# Altium PCB FM375_TEST_BOARD.PcbDoc (part 2 of 2)
Units mm, origin at the board's own origin, x right, y up, seen from the top; angles counter-clockwise.
Board outline 713.36 x 446.91 mm, 2 copper layers (Top Layer, Bottom Layer); 207 components, 223 nets, 969 pads, 41 vias.
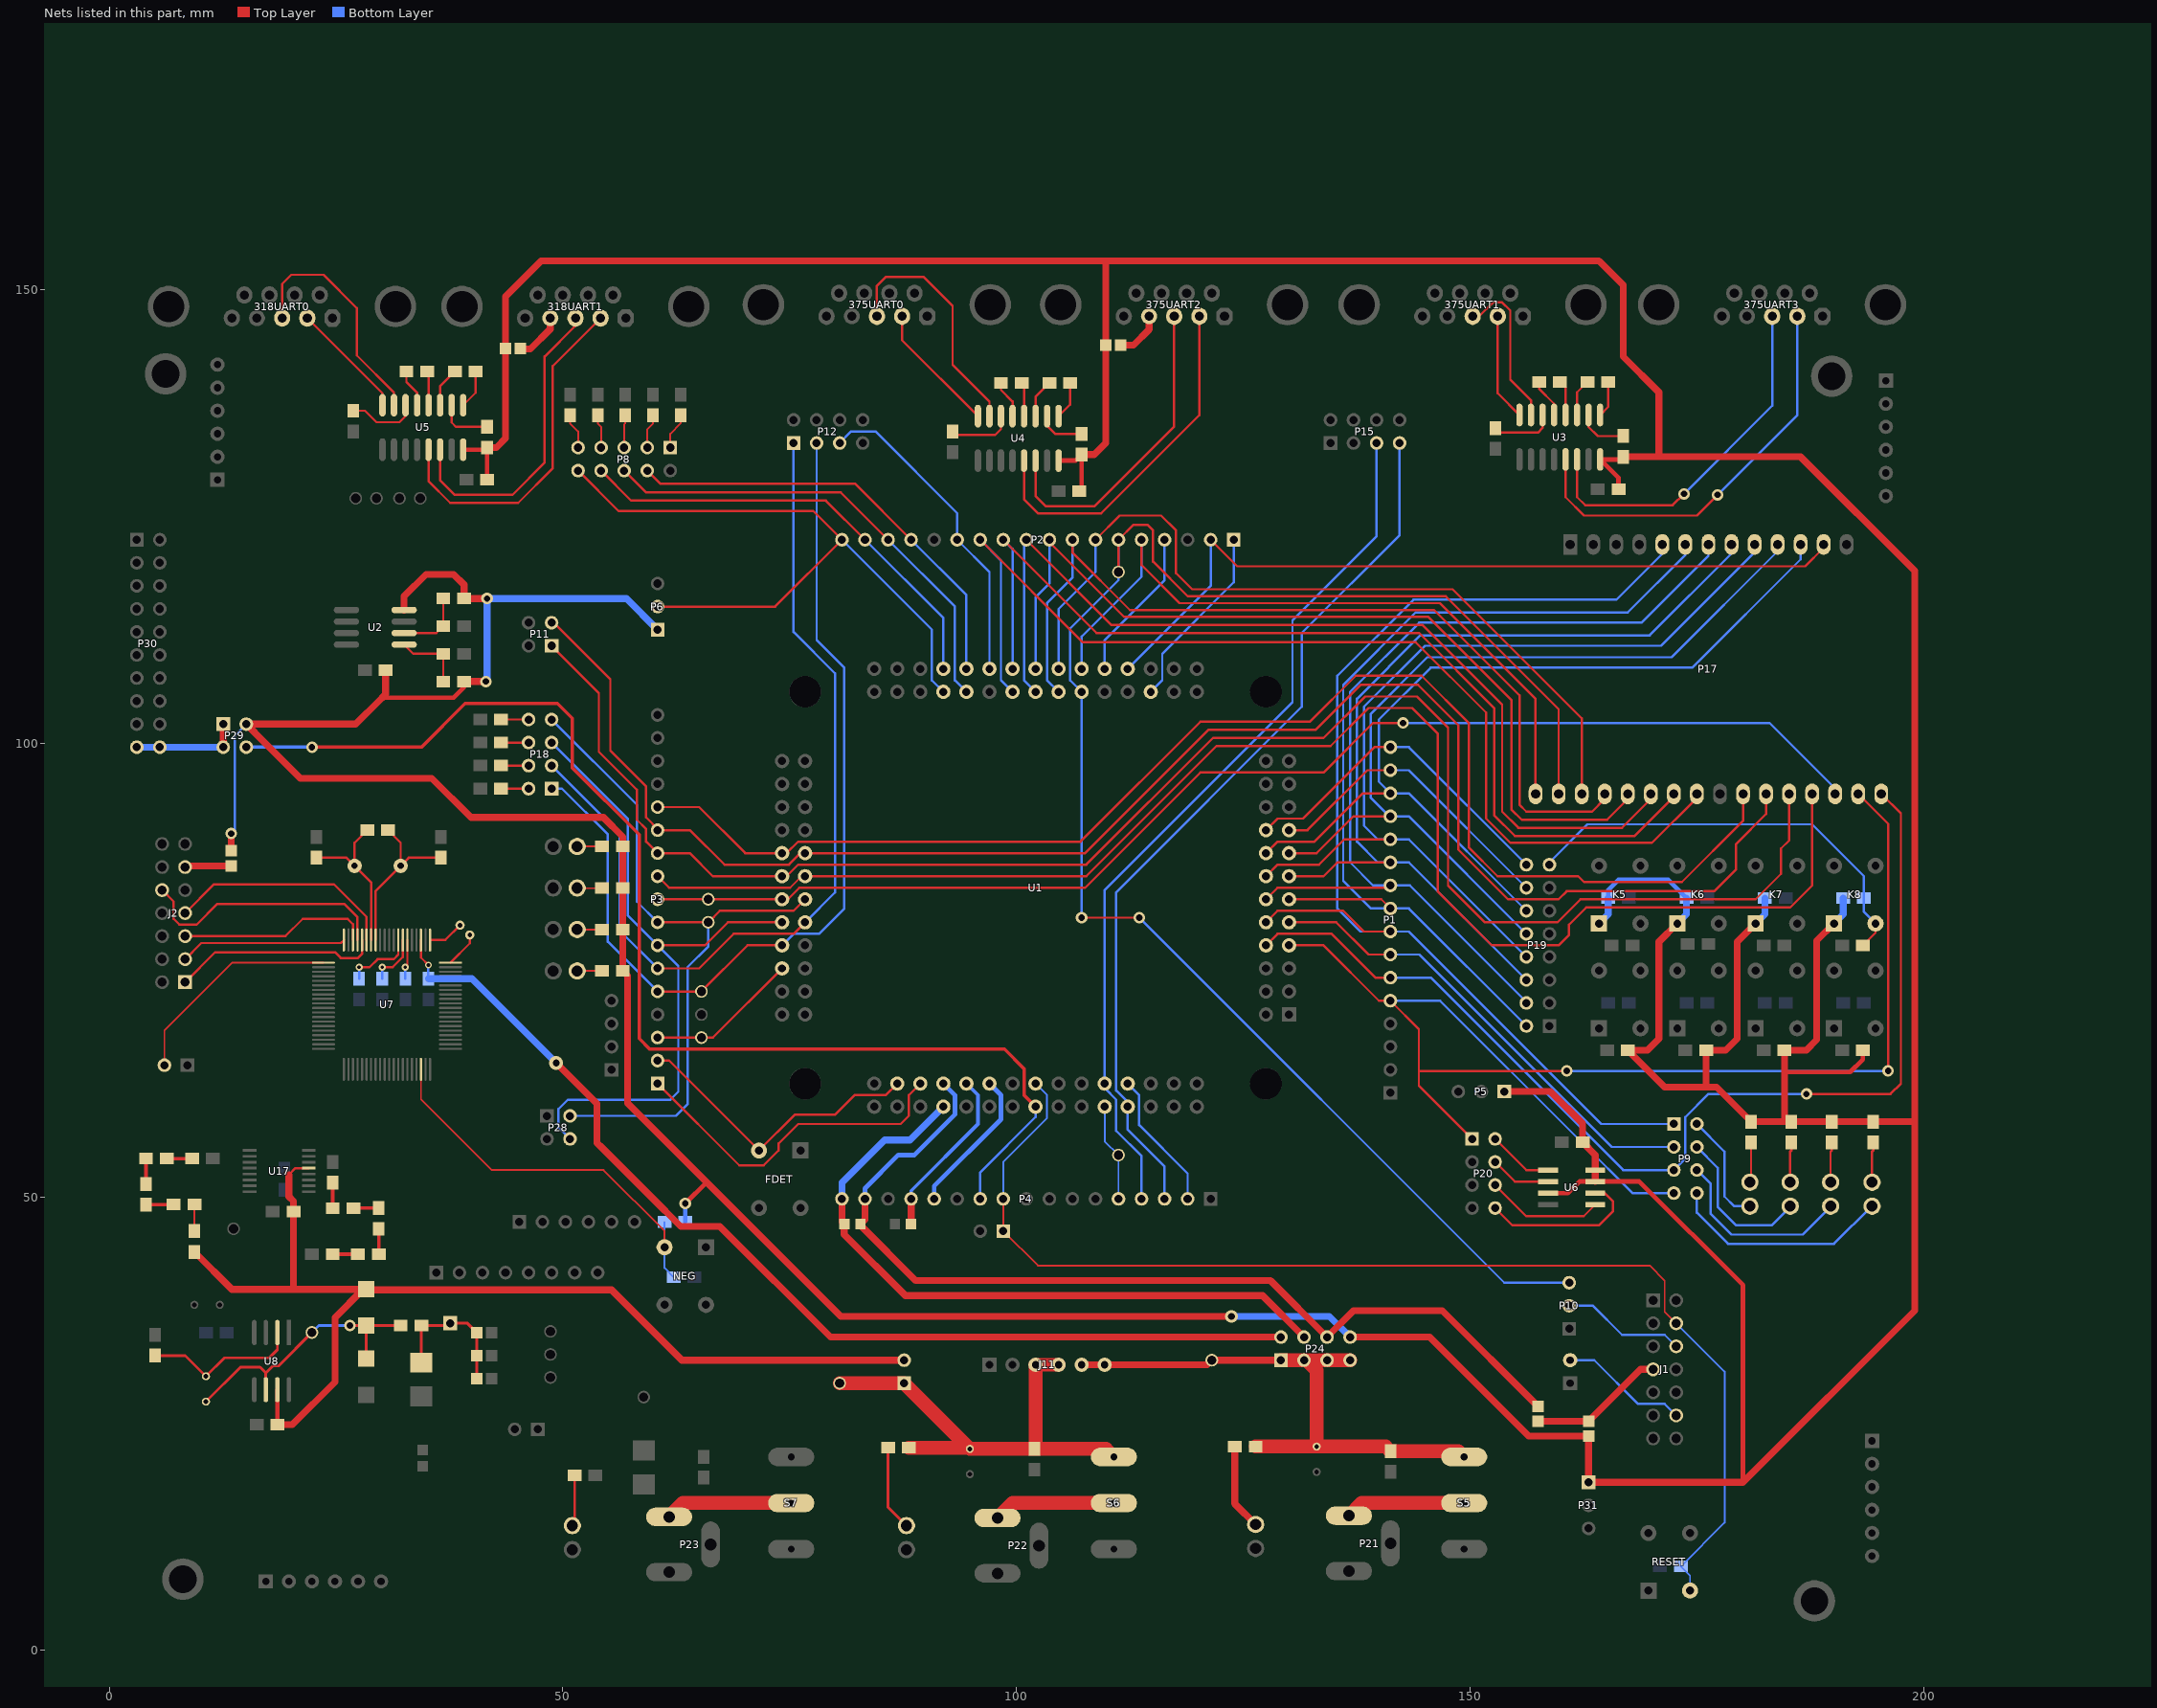
[diagram p2: the nets of this part, all layers, seen from the top]

## Via types
v1: diameter 1.27, hole 0.711, Top Layer to Bottom Layer, 23 vias
v2: diameter 0.762, hole 0.406, Top Layer to Bottom Layer, 8 vias
v3: diameter 0.914, hole 0.508, Top Layer to Bottom Layer, 3 vias
v4: diameter 1.397, hole 0.762, Top Layer to Bottom Layer, 2 vias
v5: diameter 1.016, hole 0.559, Top Layer to Bottom Layer, 2 vias
v6: diameter 0.889, hole 0.483, Top Layer to Bottom Layer, 1 vias
v7: diameter 0.762, hole 0.381, Top Layer to Bottom Layer, 1 vias
v8: diameter 1.524, hole 0.762, Top Layer to Bottom Layer, 1 vias

## Nets (pads, with @x,y where several pads share a name; then routed paths per layer and width w, separated by ;. In a path a pad name is that pad's centre, name@x,y a point inside that pad or via, vN(x,y) a via of type N, cw(c..) or ccw(c..) an arc to the next point about the centre after c; other vN are vias at no path point) (continued)
KEY8: C57.2 K8.2 P19.15 R47.2 | length 47.8
  Top Layer w0.254: R47.2@193.294,77.724 194.691,79.121 K8.2@194.691,80.137
  Bottom Layer w0.254: P19.15@158.75,86.614 158.75,86.868 162.941,91.059 187.706,91.059 193.421,85.344 C57.2@193.421,82.931 193.421,81.407 K8.2@194.691,80.137
LED1: P9.8 V1.K | length 24.6
  Bottom Layer w0.254: P9.8@175.006,50.419 175.006,48.26 178.435,44.831 190.119,44.831 194.259,48.971 V1.K@194.31,48.971
LED2: P9.6 V2.K | length 21
  Bottom Layer w0.254: P9.6@175.006,52.959 176.53,51.435 176.53,48.133 178.816,45.847 186.69,45.847 189.738,48.895 V2.K@189.738,48.971
LED3: P9.4 V3.K | length 17.3
  Bottom Layer w0.254: P9.4@175.006,55.499 177.292,53.213 177.292,48.895 179.324,46.863 183.261,46.863 185.293,48.895 V3.K@185.293,48.971
LED4: P9.2 V4.K | length 12.5
  Bottom Layer w0.254: P9.2@175.006,58.039 178.054,54.991 178.054,50.038 179.121,48.971 V4.K@180.848,48.971
MISO_FLASH: P20.4 U6.2 | length 6.7
  Top Layer w0.254: P20.4@152.764,53.848 152.781,53.848 154.94,51.689 U6.2@158.606,51.689
MOSI_FLASH: P20.6 U6.5 | length 13
  Top Layer w0.254: P20.6@152.764,51.308 156.193,47.879 162.536,47.879 U6.5@163.806,49.149
NEG: C16.1 NEG.2 R31.1 U7.38 | length 44.5
  Top Layer w0.203: U7.38@34.372,64.069 34.372,60.751 42.164,52.959 54.483,52.959 61.214,46.228 NEG.2@61.214,44.45
  Bottom Layer w0.203: R31.1@61.214,47.244 NEG.2@61.214,44.45 61.214,42.164 C16.1@62.23,41.148
Net318UART0_2: 318UART0.2 U5.8 | length 13
  Top Layer w0.254: 318UART0.2@21.84,146.863 30.124,138.578 U5.8@30.124,137.259
Net318UART0_3: 318UART0.3 U5.7 | length 26.3
  Top Layer w0.254: 318UART0.3@19.067,146.863 19.067,150.622 20.083,151.638 23.622,151.638 27.305,147.955 27.305,142.748 31.394,138.659 U5.7@31.394,137.259
Net318UART1_2: 318UART1.2 U5.13 | length 38.5
  Top Layer w0.254: U5.13@35.204,132.359 35.204,128.88 37.592,126.492 45.085,126.492 48.895,130.302 48.895,141.584 318UART1.2@54.174,146.863
Net318UART1_3: 318UART1.3 U5.14 | length 34.4
  Top Layer w0.254: U5.14@36.474,132.359 36.474,129.007 38.1,127.381 44.45,127.381 48.006,130.937 48.006,142.621 51.401,146.016 318UART1.3@51.401,146.863
Net318UART1_4: 318UART1.4 S9.2 | length 5.4
  Top Layer w0.762: S9.2@45.339,143.446 46.419,143.446 48.628,145.656 318UART1.4@48.628,146.863
Net375UART0_2: 375UART0.2 U4.8 | length 14.5
  Top Layer w0.254: 375UART0.2@87.397,147.066 87.397,144.415 U4.8@95.758,136.054
Net375UART0_3: 375UART0.3 U4.7 | length 27.2
  Top Layer w0.254: 375UART0.3@84.624,147.066 84.624,150.41 85.598,151.384 89.789,151.384 92.964,148.209 92.964,141.732 97.028,137.668 U4.7@97.028,136.054
Net375UART1_2: 375UART1.2 U3.8 | length 11.9
  Top Layer w0.254: 375UART1.2@153.056,147.066 153.056,138.573 U3.8@155.448,136.181
Net375UART1_3: 375UART1.3 U3.7 | length 17.6
  Top Layer w0.254: 375UART1.3@150.283,147.066 151.003,147.066 152.527,148.59 153.543,148.59 154.432,147.701 154.432,140.081 156.718,137.795 U3.7@156.718,136.181
Net375UART2_2: 375UART2.2 U4.13 | length 39.6
  Top Layer w0.254: U4.13@100.838,131.154 100.838,126.873 102.362,125.349 109.347,125.349 120.163,136.165 375UART2.2@120.163,147.066
Net375UART2_3: 375UART2.3 U4.14 | length 35.5
  Top Layer w0.254: U4.14@102.108,131.154 102.108,127.254 103.251,126.111 108.585,126.111 117.39,134.916 375UART2.3@117.39,147.066
Net375UART2_4: 375UART2.4 S8.2 | length 5.4
  Top Layer w0.203: 375UART2.4@114.618,147.066 375UART2.4@114.681,147.003
  Top Layer w0.762: S8.2@111.506,143.891 112.903,143.891 114.618,145.606 375UART2.4@114.618,147.066
Net375UART3_2: 375UART3.2 U3.13 | length 46
  Top Layer w0.254: U3.13@160.528,131.281 160.528,127.127 162.56,125.095 175.006,125.095 v1(177.292,127.381)
  Bottom Layer w0.254: v1(177.292,127.381) 186.076,136.165 375UART3.2@186.076,147.066
Net375UART3_3: 375UART3.3 U3.14 | length 40.4
  Top Layer w0.254: U3.14@161.798,131.281 161.798,127.127 162.687,126.238 172.339,126.238 v1(173.588,127.487)
  Bottom Layer w0.254: v1(173.588,127.487) 183.303,137.202 375UART3.3@183.303,147.066
"NetADC VIN_1": "ADC VIN.1" C30.1 R22.1 S2.2 S3.2 S4.2 | length 15.8
  Top Layer w0.305: C30.1@34.417,31.748 R22.1@34.417,35.814 37.338,35.814 37.592,36.068 39.497,36.068 S2.2@40.513,35.052 S3.2@40.513,32.512 S4.2@40.513,29.972
NetC2_1: C2.1 U4.2 | length 5.2
  Top Layer w0.254: U4.2@103.378,136.054 103.378,135.001 104.267,134.112 C2.1@107.188,134.112
NetC3_1: C3.1 U4.3 | length 4.3
  Top Layer w0.254: U4.3@102.108,136.054 102.108,138.176 C3.1@103.632,139.7
NetC3_2: C3.2 U4.1 | length 4.2
  Top Layer w0.254: U4.1@104.648,136.054 105.918,137.324 C3.2@105.918,139.7
NetC4_1: C4.1 U4.4 | length 3.8
  Top Layer w0.254: C4.1@100.584,139.7 100.838,139.446 U4.4@100.838,136.054
NetC4_2: C4.2 U4.5 | length 4.2
  Top Layer w0.254: C4.2@98.298,139.7 98.298,138.938 99.568,137.668 U4.5@99.568,136.054
NetC6_1: C6.1 U4.6 | length 7.2
  Top Layer w0.254: C6.1@92.964,134.366 93.345,133.985 97.663,133.985 98.298,134.62 U4.6@98.298,136.054
NetC7_1: C7.1 U3.2 | length 5.5
  Top Layer w0.254: U3.2@163.068,136.181 163.068,134.874 164.084,133.858 C7.1@166.878,133.858
NetC8_1: C8.1 U3.3 | length 4.1
  Top Layer w0.254: U3.3@161.798,136.181 161.798,138.684 C8.1@162.941,139.827
NetC8_2: C8.2 U3.1 | length 4
  Top Layer w0.254: U3.1@164.338,136.181 165.227,137.07 C8.2@165.227,139.827
NetC9_1: C9.1 U3.4 | length 3.9
  Top Layer w0.254: C9.1@159.893,139.827 160.528,139.192 U3.4@160.528,136.181
NetC9_2: C9.2 U3.5 | length 4.3
  Top Layer w0.254: C9.2@157.607,139.827 157.607,139.065 159.258,137.414 U3.5@159.258,136.181
NetC11_1: C11.1 U3.6 | length 7.1
  Top Layer w0.254: C11.1@152.781,134.747 153.289,134.239 157.48,134.239 157.988,134.747 U3.6@157.988,136.181
NetC12_1: C12.1 P18.4 | length 3
  Top Layer w0.254: C12.1@43.18,97.536 P18.4@46.228,97.536
NetC13_1: C13.1 P18.6 | length 3
  Top Layer w0.254: C13.1@43.18,100.076 P18.6@46.228,100.076
NetC14_1: C14.1 P18.8 | length 3
  Top Layer w0.254: C14.1@43.18,102.616 P18.8@46.228,102.616
NetC15_1: C15.1 P18.2 | length 3
  Top Layer w0.254: C15.1@43.18,94.996 P18.2@46.228,94.996
NetC29_1: "integrator out.1" C29.1 D6.1 D7.2 R22.2 U8.6 | length 30.9
  Top Layer w0.305: C29.1@10.668,27.432 14.478,31.242 16.637,31.242 17.272,30.607 ; U8.6@17.272,28.752 17.272,30.607 ; 22.352,35.052 18.669,31.369 18.034,31.369 17.272,30.607 ; v1(26.543,35.814) D6.1@28.321,35.814 ; D7.2@28.321,32.194 D6.1@28.321,35.814 ; R22.2@32.131,35.814 D6.1@28.321,35.814
  Bottom Layer w0.305: 22.352,35.052 23.114,35.814 v1(26.543,35.814)
NetC29_2: C29.2 R21.1 U8.2 | length 17.5
  Top Layer w0.305: R21.1@5.08,32.512 8.382,32.512 C29.2@10.668,30.226 12.7,32.258 17.653,32.258 18.542,33.147 U8.2@18.542,35.052
NetC42_1: C42.1 U5.2 | length 6
  Top Layer w0.254: U5.2@37.744,137.259 37.744,135.357 38.227,134.874 C42.1@41.656,134.874
NetC43_1: C43.1 U5.3 | length 4.4
  Top Layer w0.254: U5.3@36.474,137.259 36.474,139.344 C43.1@38.1,140.97
NetC43_2: C43.2 U5.1 | length 4.3
  Top Layer w0.254: U5.1@39.014,137.259 40.386,138.631 C43.2@40.386,140.97
NetC44_1: C44.1 U5.4 | length 3.8
  Top Layer w0.254: C44.1@35.052,140.97 35.204,140.818 U5.4@35.204,137.259
NetC44_2: C44.2 U5.5 | length 4.2
  Top Layer w0.254: C44.2@32.766,140.97 32.766,139.827 33.934,138.659 U5.5@33.934,137.259
NetC46_2: C46.2 U5.6 | length 7.8
  Top Layer w0.254: C46.2@26.924,136.652 28.194,136.652 29.464,135.382 32.004,135.382 32.664,136.042 U5.6@32.664,137.259
NetD1_A: D1.A R23.2 | length 2.7
  Top Layer w0.203: D1.A@51.587,74.904 R23.2@54.33,74.904
NetD2_A: D2.A R24.2 | length 2.7
  Top Layer w0.203: D2.A@51.587,79.476 R24.2@54.33,79.476
NetD3_A: D3.A R25.2 | length 2.7
  Top Layer w0.203: D3.A@51.611,84.023 R25.2@54.331,84.023
NetD4_A: D4.A R26.2 | length 2.7
  Top Layer w0.203: D4.A@51.587,88.62 R26.2@54.33,88.62
NetD8_A: D8.A R35.2 | length 9.5
  Top Layer w0.762: R35.2@124.079,22.479 124.079,16.18 D8.A@126.365,13.894
NetD9_A: D9.A R36.2 | length 9.4
  Top Layer w0.305: R36.2@85.852,22.352 85.852,15.799 D9.A@87.884,13.767
NetD10_A: D10.A R37.2 | length 5.6
  Top Layer w0.305: D10.A@51.054,13.767 51.308,14.021 R37.2@51.308,19.304
NetJ1_12: J1.12 JP1.2 | length 14.2
  Bottom Layer w0.254: JP1.2@161.036,32.004 163.703,32.004 168.529,27.178 171.45,27.178 J1.12@172.72,25.908
NetP8_1: P8.1 R5.1 | length 4
  Top Layer w0.203: P8.1@61.849,132.588 61.849,134.112 62.992,135.255 R5.1@62.992,136.144
NetP8_3: P8.3 R6.1 | length 3.8
  Top Layer w0.203: P8.3@59.309,132.588 59.309,134.62 59.944,135.255 R6.1@59.944,136.144
NetP8_5: P8.5 R7.1 | length 3.6
  Top Layer w0.203: P8.5@56.769,132.588 56.769,135.128 56.896,135.255 R7.1@56.896,136.144
NetP8_7: P8.7 R8.1 | length 3.7
  Top Layer w0.203: R8.1@53.848,136.144 53.848,135.255 54.229,134.874 P8.7@54.229,132.588
NetP8_9: P8.9 R9.1 | length 3.9
  Top Layer w0.203: R9.1@50.8,136.144 50.8,135.255 51.689,134.366 P8.9@51.689,132.588
NetP21_1: P21.1 S5.2 | length 13.3
  Top Layer w1.524: P21.1@136.652,14.859 138.049,16.256 S5.2@149.352,16.256
NetP22_1: P22.1 S6.2 | length 13.5
  Top Layer w1.524: P22.1@97.917,14.605 99.568,16.256 S6.2@110.744,16.256
NetP23_1: P23.1 S7.2 | length 14.1
  Top Layer w1.524: P23.1@61.722,14.732 63.246,16.256 S7.2@75.184,16.256
NetR1_2: R1.2 V1.A | length 4.4
  Top Layer w0.254: V1.A@194.31,51.613 194.31,54.991 194.437,55.118 R1.2@194.437,56.007
NetR2_2: R2.2 V2.A | length 4.4
  Top Layer w0.254: V2.A@189.738,51.613 189.738,54.991 189.865,55.118 R2.2@189.865,56.007
NetR3_2: R3.2 V3.A | length 4.4
  Top Layer w0.254: V3.A@185.293,51.613 185.293,54.991 185.42,55.118 R3.2@185.42,56.007
NetR4_2: R4.2 V4.A | length 4.4
  Top Layer w0.254: V4.A@180.848,51.613 180.975,51.74 R4.2@180.975,56.007
NetR10_1: R10.1 R11.2 | length 2.8
  Top Layer w0.381: R11.2@6.35,54.229 R10.1@9.144,54.229
NetR11_1: R11.1 R12.2 | length 2.8
  Top Layer w0.381: R12.2@4.064,51.435 R11.1@4.064,54.229
NetR12_1: R12.1 R13.1 | length 3
  Top Layer w0.381: R12.1@4.064,49.149 R13.1@7.112,49.149
NetR13_2: R13.2 R14.1 | length 2.9
  Top Layer w0.203: R14.1@9.398,46.228 R13.2@9.398,49.149
NetR15_2: R15.2 R16.1 | length 2.8
  Top Layer w0.381: R16.1@24.638,48.768 R15.2@24.638,51.562
NetR16_2: R16.2 R17.1 | length 2.8
  Top Layer w0.381: R16.2@26.924,48.768 R17.1@29.718,48.768
NetR17_2: R17.2 R18.1 | length 2.8
  Top Layer w0.381: R18.1@29.718,43.688 R17.2@29.718,46.482
NetR18_2: R18.2 R19.1 | length 2.8
  Top Layer w0.381: R19.1@24.638,43.688 R18.2@27.432,43.688
NetR27_2: R27.2 R30.2 U2.5 | length 7.8
  Top Layer w0.254: U2.5@32.512,110.871 33.528,109.855 R30.2@36.83,109.855 R27.2@36.83,106.807
NetR28_2: R28.2 R29.1 U2.6 | length 7.7
  Top Layer w0.254: U2.6@32.512,112.141 36.068,112.141 R29.1@36.83,112.903 R28.2@36.83,115.951
OSCIN: C22.1 R20.2 U7.73 XTAL2.2 | length 18.6
  Top Layer w0.254: U7.73@29.372,78.319 29.372,83.728 XTAL2.2@32.131,86.487 ; R20.2@30.734,90.424 32.131,89.027 XTAL2.2@32.131,86.487 ; C22.1@36.576,87.376 33.02,87.376 XTAL2.2@32.131,86.487
OSCOUT: C23.1 R20.1 U7.74 XTAL2.1 | length 18
  Top Layer w0.254: C23.1@22.86,87.376 26.162,87.376 XTAL2.1@27.051,86.487 ; R20.1@28.448,90.424 27.051,89.027 XTAL2.1@27.051,86.487 ; U7.74@28.872,78.319 28.872,84.666 XTAL2.1@27.051,86.487
PA4: P1.5 P9.7 P17.28 P20.1 U1.7 | length 156.3
  Top Layer w0.254: U1.7@130.048,77.724 133.858,77.724 139.954,71.628 P1.5@141.224,71.628 144.353,68.499 144.353,63.881 ; P20.1@150.224,56.388 144.353,62.259 144.353,63.881 ; v1(160.655,63.881) 144.353,63.881 ; P17.28@192.786,94.42 196.088,91.118 v1(196.088,63.881)
  Bottom Layer w0.254: P1.5@141.224,71.628 146.685,71.628 162.369,55.944 167.894,50.419 P9.7@172.466,50.419 ; v1(160.655,63.881) v1(196.088,63.881)
PA5: P1.6 P9.5 P17.29 U1.8 | length 120.7
  Top Layer w0.254: U1.8@127.508,77.724 128.778,78.994 134.747,78.994 139.573,74.168 P1.6@141.224,74.168 ; v1(187.071,61.341) 196.342,61.341 197.485,62.484 197.485,92.261 P17.29@195.326,94.42
  Bottom Layer w0.254: P1.6@141.224,74.168 145.669,74.168 166.878,52.959 P9.5@172.466,52.959 173.736,54.229 173.736,58.801 176.276,61.341 v1(187.071,61.341)
PA6: P1.7 P9.3 U1.9 | length 52.7
  Top Layer w0.254: U1.9@130.048,80.264 135.255,80.264 138.811,76.708 P1.7@141.224,76.708
  Bottom Layer w0.254: P1.7@141.224,76.708 144.399,76.708 165.608,55.499 P9.3@172.466,55.499
PA7: P1.8 P9.1 P17.5 U1.10 | length 130.2
  Top Layer w0.254: U1.10@127.508,80.264 128.778,81.534 136.017,81.534 138.303,79.248 P1.8@141.224,79.248
  Bottom Layer w0.254: P17.5@171.196,121.92 171.196,120.904 166.116,115.824 143.764,115.824 135.382,107.442 135.382,81.788 137.922,79.248 143.256,79.248 164.465,58.039 P9.1@172.466,58.039
PAD_CPLL: C18.2 U7.68 | length 7.8
  Top Layer w0.254: v2(27.559,75.311) 28.702,75.311 29.591,76.2 31.369,76.2 31.872,76.703 U7.68@31.872,78.319
  Bottom Layer w0.254: C18.2@27.559,74.041 v2(27.559,75.311)
PB0: P1.9 P17.6 P19.2 U1.11 | length 104.8
  Top Layer w0.254: U1.11@130.048,82.804 140.208,82.804 P1.9@141.224,81.788
  Bottom Layer w0.254: P19.2@156.21,68.834 143.256,81.788 139.065,81.788 136.017,84.836 136.017,106.426 144.018,114.427 167.386,114.427 173.736,120.777 P17.6@173.736,121.92
PB1: P1.10 P17.7 P19.4 U1.12 | length 106
  Top Layer w0.254: U1.12@127.508,82.804 128.778,84.074 140.97,84.074 P1.10@141.224,84.328
  Bottom Layer w0.254: P19.4@156.21,71.374 156.21,71.501 143.383,84.328 139.319,84.328 136.779,86.868 136.779,105.664 144.399,113.284 168.91,113.284 176.276,120.65 P17.7@176.276,121.92
PB2: P1.11 P17.8 P19.6 U1.13 | length 101.5
  Top Layer w0.254: U1.13@130.048,85.344 133.858,85.344 135.382,86.868 P1.11@141.224,86.868
  Bottom Layer w0.254: P19.6@156.21,73.914 143.256,86.868 139.827,86.868 137.541,89.154 137.541,104.902 144.526,111.887 169.799,111.887 178.816,120.904 P17.8@178.816,121.92
PB3: P1.12 P17.9 P19.8 U1.14 | length 103.4
  Top Layer w0.254: U1.14@127.508,85.344 128.778,86.614 133.35,86.614 136.144,89.408 P1.12@141.224,89.408
  Bottom Layer w0.254: P19.8@156.21,76.454 143.256,89.408 P1.12@141.224,89.408 139.827,89.408 138.303,90.932 138.303,104.013 145.034,110.744 171.069,110.744 181.356,121.031 P17.9@181.356,121.92
PB4: P1.13 P17.10 P19.10 U1.15 | length 98.5
  Top Layer w0.254: U1.15@130.048,87.884 133.096,87.884 137.16,91.948 P1.13@141.224,91.948
  Bottom Layer w0.254: P19.10@156.21,78.994 143.256,91.948 P1.13@141.224,91.948 141.097,91.948 139.065,93.98 139.065,103.251 145.288,109.474 172.212,109.474 183.896,121.158 P17.10@183.896,121.92
PB5: P1.14 P17.11 P19.12 U1.16 | length 100.9
  Top Layer w0.254: U1.16@127.508,87.884 128.778,89.154 132.842,89.154 138.176,94.488 P1.14@141.224,94.488
  Bottom Layer w0.254: P19.12@156.21,81.534 143.256,94.488 P1.14@141.224,94.488 139.954,95.758 139.954,102.616 145.669,108.331 174.498,108.331 186.436,120.269 P17.11@186.436,121.92
PB6: P1.15 P19.14 U1.17 | length 34.3
  Top Layer w0.254: U1.17@130.048,90.424 132.08,90.424 138.684,97.028 P1.15@141.224,97.028
  Bottom Layer w0.254: P1.15@141.224,97.028 143.256,97.028 P19.14@156.21,84.074
PB7: P1.16 P19.16 U1.18 | length 37.9
  Top Layer w0.254: U1.18@127.508,90.424 128.778,91.694 131.572,91.694 139.446,99.568 P1.16@141.224,99.568
  Bottom Layer w0.254: P1.16@141.224,99.568 143.256,99.568 P19.16@156.21,86.614
PC0: P2.2 P17.12 U1.31 | length 88
  Top Layer w0.254: P2.2@121.412,122.428 124.333,119.507 186.944,119.507 188.976,121.539 P17.12@188.976,121.92
  Bottom Layer w0.254: U1.31@112.268,108.204 121.412,117.348 P2.2@121.412,122.428
PC2: P2.5 P17.14 U1.35 | length 79.8
  Top Layer w0.254: P2.5@113.792,122.428 113.792,119.634 117.983,115.443 146.685,115.443 157.226,104.902 P17.14@157.226,94.42
  Bottom Layer w0.254: U1.35@107.188,108.204 107.188,111.76 113.792,118.364 P2.5@113.792,122.428
PC3: P2.6 P10.3 P17.15 T15.1 U1.36 | length 188.5
  Top Layer w0.254: v1(107.188,80.772) v1(113.538,80.772) ; T15.1@111.252,118.491 T15.1@111.252,118.872 P2.6@111.252,122.428 112.903,124.079 114.427,124.079 115.062,123.444 115.062,120.015 118.872,116.205 147.32,116.205 159.766,103.759 P17.15@159.766,94.42 P17.15@159.766,93.599
  Bottom Layer w0.254: v1(107.188,80.772) U1.36@107.188,105.664 105.918,106.934 105.918,112.649 111.252,117.983 P2.6@111.252,122.428 ; v1(113.538,80.772) 153.772,40.538 P10.3@160.931,40.538
PC4: P2.7 P17.16 U1.37 | length 90.9
  Top Layer w0.254: P2.7@108.712,122.428 111.379,125.095 115.951,125.095 117.602,123.444 117.602,118.745 119.38,116.967 148.082,116.967 162.306,102.743 P17.16@162.306,94.42
  Bottom Layer w0.254: U1.37@104.648,108.204 104.648,114.808 108.712,118.872 P2.7@108.712,122.428
PC5: P2.8 P17.17 U1.38 | length 98.6
  Top Layer w0.254: P2.8@106.172,122.428 106.172,121.031 112.522,114.681 146.05,114.681 155.448,105.283 155.448,93.218 156.21,92.456 163.449,92.456 164.846,93.853 P17.17@164.846,94.42
  Bottom Layer w0.254: U1.38@104.648,105.664 103.378,106.934 103.378,115.443 106.172,118.237 P2.8@106.172,122.428
PC6: P2.9 P17.18 U1.39 | length 100.1
  Top Layer w0.254: P2.9@103.632,122.428 103.632,122.174 111.887,113.919 145.415,113.919 154.559,104.775 154.559,92.71 155.702,91.567 165.1,91.567 167.386,93.853 P17.18@167.386,94.42
  Bottom Layer w0.254: U1.39@102.108,108.204 102.108,116.078 103.632,117.602 P2.9@103.632,122.428
PC7: P2.10 P17.19 U1.40 | length 108.2
  Top Layer w0.254: P2.10@101.092,122.428 110.49,113.03 144.78,113.03 153.543,104.267 153.543,92.456 155.321,90.678 166.751,90.678 169.926,93.853 P17.19@169.926,94.42
  Bottom Layer w0.254: P2.10@101.092,122.428 100.838,122.174 100.838,106.934 U1.40@102.108,105.664
PD0: P2.11 P17.20 U1.41 | length 111.1
  Top Layer w0.254: P2.11@98.552,122.428 108.839,112.141 144.399,112.141 152.654,103.886 152.654,92.075 154.94,89.789 168.148,89.789 172.466,94.107 P17.20@172.466,94.42
  Bottom Layer w0.254: P2.11@98.552,122.428 99.568,121.412 U1.41@99.568,108.204
PD1: P2.12 P17.21 U1.42 | length 120.4
  Top Layer w0.254: P2.12@96.012,122.428 107.315,111.125 144.018,111.125 151.765,103.378 151.765,91.694 154.432,89.027 170.053,89.027 175.006,93.98 P17.21@175.006,94.42
  Bottom Layer w0.254: P2.12@96.012,122.428 98.298,120.142 98.298,106.934 U1.42@99.568,105.664
PD2: P2.13 P12.5 U1.43 | length 35.8
  Bottom Layer w0.254: P12.5@80.518,133.096 81.788,134.366 84.455,134.366 93.472,125.349 P2.13@93.472,122.428 97.028,118.872 U1.43@97.028,108.204
PD4: P2.15 P8.4 U1.45 | length 49
  Top Layer w0.254: P8.4@59.309,130.048 60.732,128.625 82.195,128.625 P2.15@88.392,122.428
  Bottom Layer w0.254: P2.15@88.392,122.428 94.488,116.332 U1.45@94.488,108.204
PD5: P2.16 P8.6 U1.46 | length 52.6
  Top Layer w0.254: P8.6@56.769,130.048 59.182,127.635 80.645,127.635 P2.16@85.852,122.428
  Bottom Layer w0.254: P2.16@85.852,122.428 93.218,115.062 93.218,106.934 U1.46@94.488,105.664
PD6: P2.17 P8.8 U1.47 | length 50
  Top Layer w0.254: P8.8@54.229,130.048 57.531,126.746 78.994,126.746 P2.17@83.312,122.428
  Bottom Layer w0.254: P2.17@83.312,122.428 91.948,113.792 U1.47@91.948,108.204
PD7: P2.18 P6.2 P8.10 U1.48 | length 77
  Top Layer w0.254: P8.10@51.689,130.048 56.134,125.603 77.597,125.603 P2.18@80.772,122.428 73.406,115.062 P6.2@60.452,115.062
  Bottom Layer w0.254: P2.18@80.772,122.428 90.678,112.522 90.678,106.934 U1.48@91.948,105.664
PE4: P3.13 P17.23 U1.63 | length 153.1
  Top Layer w0.254: P3.13@60.452,92.964 65.024,92.964 70.104,87.884 U1.63@74.168,87.884 74.676,87.884 75.946,89.154 107.061,89.154 120.269,102.362 132.334,102.362 137.414,107.442 144.653,107.442 149.86,102.235 149.86,88.519 153.035,85.344 161.925,85.344 162.56,84.709 173.355,84.709 180.086,91.44 P17.23@180.086,94.42
PE5: P3.12 P11.3 P17.24 U1.64 | length 185.3
  Top Layer w0.254: P11.3@48.768,113.284 49.022,113.284 55.245,107.061 55.245,99.187 59.182,95.25 59.182,91.821 60.579,90.424 64.008,90.424 67.818,86.614 74.93,86.614 76.2,87.884 U1.64@76.708,87.884 107.569,87.884 121.158,101.473 132.969,101.473 137.922,106.426 144.272,106.426 148.717,101.981 148.717,88.265 154.178,82.804 159.766,82.804 160.655,83.693 176.911,83.693 179.324,86.106 179.324,88.9 182.626,92.202 P17.24@182.626,94.42
PE6: P3.11 P11.1 P17.25 U1.65 | length 192.7
  Top Layer w0.254: P11.1@48.768,110.744 53.975,105.537 53.975,99.06 58.166,94.869 58.166,91.567 59.182,90.551 59.182,89.154 P3.11@60.452,87.884 64.008,87.884 66.548,85.344 U1.65@74.168,85.344 74.676,85.344 75.946,86.614 107.696,86.614 121.666,100.584 133.858,100.584 138.43,105.156 144.145,105.156 147.574,101.727 147.574,84.328 151.638,80.264 159.639,80.264 162.179,82.804 181.483,82.804 184.277,85.598 184.277,88.392 185.166,89.281 P17.25@185.166,94.42
PE7: P3.10 P17.26 U1.66 | length 170.5
  Top Layer w0.254: P3.10@60.452,85.344 61.722,84.074 75.057,84.074 76.327,85.344 U1.66@76.708,85.344 107.696,85.344 122.047,99.695 134.62,99.695 138.811,103.886 143.637,103.886 146.431,101.092 146.431,83.693 152.4,77.724 159.766,77.724 160.909,78.867 160.909,80.01 162.814,81.915 185.293,81.915 187.706,84.328 P17.26@187.706,94.42
PF0: P3.9 P17.27 T2.1 U1.67 | length 141.4
  Top Layer w0.254: P3.9@60.452,82.804 T2.1@66.04,82.804 U1.67@74.168,82.804 74.803,82.804 76.073,84.074 107.569,84.074 120.269,96.774 133.858,96.774 139.319,102.235 v1(142.621,102.235)
  Bottom Layer w0.254: v1(142.621,102.235) 183.007,102.235 190.246,94.996 P17.27@190.246,94.42
PF1: P3.8 P18.7 P28.2 T1.1 U1.68 | length 79
  Top Layer w0.254: P3.8@60.452,80.264 T1.1@66.04,80.264 67.31,81.534 75.438,81.534 U1.68@76.708,82.804
  Bottom Layer w0.254: P18.7@48.768,102.616 58.166,93.218 58.166,82.55 P3.8@60.452,80.264 ; P28.2@50.8,58.928 62.484,58.928 63.754,60.198 63.754,75.311 66.04,77.597 T1.1@66.04,80.264
PF2: P3.7 P18.5 P28.4 U1.69 | length 76.9
  Top Layer w0.254: P3.7@60.452,77.724 65.659,77.724 68.199,80.264 U1.69@74.168,80.264
  Bottom Layer w0.254: P18.5@48.768,100.076 57.15,91.694 57.15,81.026 P3.7@60.452,77.724 62.738,75.438 62.738,61.595 61.849,60.706 50.546,60.706 49.53,59.69 49.53,57.658 P28.4@50.8,56.388
PF3: P3.6 P12.1 P18.3 U1.70 | length 101.6
  Top Layer w0.254: P3.6@60.452,75.184 65.024,75.184 68.834,78.994 75.438,78.994 U1.70@76.708,80.264
  Bottom Layer w0.254: P18.3@48.768,97.536 56.261,90.043 56.261,79.375 P3.6@60.452,75.184 ; P12.1@75.438,133.096 75.438,112.268 80.01,107.696 80.01,83.566 U1.70@76.708,80.264
PF4: P3.5 P12.3 P18.1 T17.1 U1.71 | length 104.8
  Top Layer w0.254: P3.5@60.452,72.644 T17.1@65.278,72.644 70.358,77.724 U1.71@74.168,77.724
  Bottom Layer w0.254: P18.1@48.768,94.996 49.911,94.996 54.965,89.942 54.965,78.131 P3.5@60.452,72.644 ; U1.71@74.168,77.724 75.438,78.994 78.232,78.994 81.026,81.788 81.026,108.331 77.978,111.379 P12.3@77.978,133.096
PF6: P3.3 T5.1 U1.73 | length 16.9
  Top Layer w0.254: P3.3@60.452,67.564 T5.1@65.278,67.564 66.548,67.564 U1.73@74.168,75.184
PG4: P4.5 T18.1 U1.99 | length 10.8
  Bottom Layer w0.203: U1.99@109.728,59.944 109.728,56.134 T18.1@111.252,54.61 P4.5@111.252,49.784
PG5: P4.4 P15.5 U1.100 | length 97.4
  Bottom Layer w0.254: P4.4@113.792,49.784 113.792,54.483 110.998,57.277 110.998,60.706 109.728,61.976 109.728,83.82 130.429,104.521 130.429,113.538 139.7,122.809 P15.5@139.7,133.096
PG6: P4.3 P15.7 U1.101 | length 98.5
  Bottom Layer w0.254: P4.3@116.332,49.784 116.332,53.34 112.268,57.404 U1.101@112.268,59.944 112.268,60.452 110.998,61.722 110.998,83.566 131.445,104.013 131.445,112.141 142.24,122.936 P15.7@142.24,133.096
PG7: P4.2 U1.102 | length 15.4
  Bottom Layer w0.254: U1.102@112.268,62.484 113.538,61.214 113.538,57.912 118.872,52.578 P4.2@118.872,49.784
PH0: P4.11 P29.4 U1.93 | length 138.2
  Top Layer w0.381: v1(22.352,99.568) 27.432,99.568 34.417,99.568 39.243,104.394 49.403,104.394 51.054,102.743 51.054,97.282 58.42,89.916 58.42,67.437 59.563,66.294 98.679,66.294 100.838,64.135 100.838,61.214 U1.93@102.108,59.944
  Bottom Layer w0.254: P4.11@96.012,49.784 96.012,52.705 102.108,58.801 U1.93@102.108,59.944
  Bottom Layer w0.381: P29.4@15.113,99.568 v1(22.352,99.568)
PROGEN: J2.7 U7.75 | length 25.3
  Top Layer w0.254: J2.7@8.382,81.28 11.557,84.455 24.765,84.455 28.372,80.848 U7.75@28.372,78.319
REMAP0: P16.2 U7.1 | length 24.4
  Top Layer w0.203: P16.2@6.096,64.516 6.096,68.326 13.589,75.819 U7.1@23.622,75.819
RESET: C1.1 J1.4 P4.10 P7.1 RESET.2 U1.94 | length 133.3
  Top Layer w0.203: P4.10@98.552,49.784 P7.1@98.552,46.228 102.362,42.418 169.799,42.418 171.45,40.767 171.45,37.338 J1.4@172.72,36.068
  Bottom Layer w0.203: P4.10@98.552,49.784 98.552,53.848 103.378,58.674 103.378,61.214 U1.94@102.108,62.484 ; J1.4@172.72,36.068 178.054,30.734 178.054,14.097 C1.1@173.228,9.271 174.244,8.255 RESET.2@174.244,6.604
SCAN_MODE: P2.1 U1.30 | length 20.6
  Bottom Layer w0.254: U1.30@114.808,105.664 116.078,106.934 116.078,109.855 123.952,117.729 P2.1@123.952,122.428
SPI_CLK_FLASH: P20.8 U6.6 | length 17.8
  Top Layer w0.254: P20.8@152.764,48.768 154.669,46.863 164.211,46.863 165.735,48.387 165.735,49.53 164.846,50.419 U6.6@163.806,50.419
SPI_CS_FLASH: P20.2 U6.1 | length 7.3
  Top Layer w0.254: P20.2@152.764,56.388 152.781,56.388 156.21,52.959 U6.1@158.606,52.959
TCK: J2.5 U7.78 | length 21.3
  Top Layer w0.254: J2.5@8.382,78.74 19.431,78.74 21.336,80.645 26.289,80.645 26.872,80.062 U7.78@26.872,78.319
TDI: J2.1 U7.76 | length 22.9
  Top Layer w0.254: J2.1@8.382,73.66 11.684,76.962 24.892,76.962 25.527,76.327 27.432,76.327 27.872,76.767 U7.76@27.872,78.319
TDO: J2.3 U7.80 | length 18.4
  Top Layer w0.254: J2.3@8.382,76.2 10.16,77.978 25.531,77.978 U7.80@25.872,78.319
TIM_IN: J1.6 P10.2 | length 13.6
  Bottom Layer w0.254: P10.2@160.931,37.998 163.551,37.998 166.751,34.798 171.45,34.798 J1.6@172.72,33.528
TMS: J2.10 U7.77 | length 28.3
  Top Layer w0.254: J2.10@5.842,83.82 7.112,82.55 7.112,80.645 7.747,80.01 9.652,80.01 11.938,82.296 25.908,82.296 27.372,80.832 U7.77@27.372,78.319
V_7816: P29.1 P29.3 P30.19 P30.20 | length 12.1
  Top Layer w0.762: P29.3@12.573,99.568 P29.1@12.573,102.108
  Bottom Layer w0.762: P30.19@3.048,99.568 P30.20@5.588,99.568 P29.3@12.573,99.568
VBAT: C17.2 P24.2 U7.63 | length 125.3
  Top Layer w0.254: U7.63@34.372,78.319 34.372,76.372 v2(35.179,75.565)
  Top Layer w0.762: v8(49.276,64.77) 53.772,60.274 53.772,55.956 59.69,50.038 ; 54.153,55.575 59.69,50.038 ; P24.2@129.159,34.544 79.502,34.544 67.31,46.736 62.992,46.736 59.69,50.038
  Bottom Layer w0.254: C17.2@35.179,74.041 v2(35.179,75.565)
  Bottom Layer w0.762: C17.2@35.179,74.041 40.005,74.041 v8(49.276,64.77)
VCC: C2.2 C5.2 C7.2 C10.2 C19.2 C24.2 C42.2 C45.2 C54.1 C55.1 C56.1 C57.1 K5.1 K6.1 K7.1 K8.1 P5.1 P6.1 P24.8 P29.2 P31.1 R1.1 R2.1 R3.1 R4.1 R23.1 R24.1 R25.1 R26.1 R27.1 R28.1 R31.2 R40.2 R41.2 R42.2 R43.2 S1.2 S8.1 S9.1 S10.1 U2.8 U3.16 U4.16 U5.16 U6.3 U6.7 U6.8 | length 867.9
  Top Layer w0.508: 29.85,104.78 30.099,105.029 37.973,105.029 39.116,106.172 R27.1@39.116,106.807 ; U5.16@39.014,132.359 41.427,132.359 C42.2@41.656,132.588 C45.2@41.656,129.032 ; v1(63.5,49.276) 65.805,51.581 65.805,51.67 ; U4.16@104.648,131.154 106.516,131.154 C2.2@107.188,131.826 107.188,128.016 C5.2@106.934,127.762 ; U6.3@158.606,50.419 160.782,50.419 162.052,51.689 U6.7@163.806,51.689 168.656,51.689 180.086,40.259 180.086,18.542 ; C10.2@166.37,128.016 166.37,129.249 U3.16@164.338,131.281 166.587,131.281 C7.2@166.878,131.572 ; 184.658,63.754 191.897,63.754 193.294,65.151 R43.2@193.294,66.167
  Top Layer w0.762: S10.1@13.462,88.138 v1(13.462,90.043) ; 29.85,104.78 27.178,102.108 P29.2@15.113,102.108 17.018,100.203 21.082,96.139 35.56,96.139 39.878,91.821 54.483,91.821 56.616,89.688 R26.1@56.616,88.62 R24.1@56.616,79.476 R23.1@56.616,74.904 57.15,74.37 57.15,60.325 65.805,51.67 80.645,36.83 v4(123.698,36.83) ; 30.099,105.029 30.48,105.41 C24.2@30.48,108.077 ; U2.8@32.512,114.681 32.512,116.205 34.925,118.618 37.973,118.618 39.116,117.475 R28.1@39.116,115.951 v1(41.656,115.951) ; R27.1@39.116,106.807 v1(41.529,106.807) ; C42.2@41.656,132.588 42.672,132.588 43.688,133.604 S9.1@43.688,143.51 43.688,149.225 47.625,153.162 109.982,153.162 ; C2.2@107.188,131.826 108.585,131.826 109.855,133.096 S8.1@109.855,143.891 109.855,153.035 109.982,153.162 ; P24.8@136.779,34.544 145.542,34.544 156.464,23.622 S1.2@163.068,23.622 P31.1@163.068,18.542 180.086,18.542 199.009,37.465 199.009,58.293 ; P5.1@153.784,61.608 158.864,61.608 162.416,58.056 C19.2@162.416,56.007 163.806,54.617 U6.8@163.806,52.959 U6.7@163.806,51.689 ; C7.2@166.878,131.572 170.815,131.572 ; K6.1@172.847,80.137 170.815,78.105 170.815,67.437 169.545,66.167 R40.2@167.386,66.167 171.45,62.103 175.895,62.103 ; K7.1@181.483,80.137 179.451,78.105 179.451,67.437 178.181,66.167 R41.2@176.022,66.167 176.022,62.23 175.895,62.103 ; K8.1@190.119,80.137 188.214,78.232 188.214,67.31 187.071,66.167 R42.2@184.658,66.167 184.658,63.754 184.658,58.293 ; 199.009,59.182 199.009,58.293 ; 109.982,153.162 164.211,153.162 166.878,150.495 166.878,142.621 170.815,138.684 170.815,131.572 ; 170.815,131.572 186.436,131.572 199.009,118.999 199.009,58.293 ; 175.895,62.103 177.165,62.103 R4.1@180.975,58.293 184.658,58.293 ; 184.658,58.293 R3.1@185.42,58.293 R2.1@189.865,58.293 193.294,58.293 R1.1@194.437,58.293 199.009,58.293
  Bottom Layer w0.254: v1(13.462,90.043) 13.843,90.424 13.843,100.838 P29.2@15.113,102.108
  Bottom Layer w0.508: R31.2@63.5,47.244 v1(63.5,49.276) ; C54.1@165.227,82.931 165.227,83.82 166.37,84.963 171.831,84.963 C55.1@173.863,82.931
  Bottom Layer w0.762: v1(41.529,106.807) 41.656,106.934 v1(41.656,115.951) 57.023,115.951 P6.1@60.452,112.522 ; v4(123.698,36.83) 134.493,36.83 P24.8@136.779,34.544 ; K5.1@164.211,80.137 165.227,81.153 C54.1@165.227,82.931 ; K6.1@172.847,80.137 173.863,81.153 C55.1@173.863,82.931 ; K7.1@181.483,80.137 182.499,81.153 C56.1@182.499,82.931 ; K8.1@190.119,80.137 191.135,81.153 C57.1@191.135,82.931
VCC5V: C37.1 C38.1 J11.3 J11.4 P25.1 R36.1 S6.1 T7.1 | length 52.1
  Top Layer w1.524: T7.1@80.518,29.464 P25.1@87.63,29.464 C38.1@94.742,22.352 ; R36.1@88.138,22.352 C38.1@94.742,22.352 ; J11.4@104.648,31.496 J11.3@102.108,31.496 102.108,22.352 C37.1@101.981,22.225 ; S6.1@110.744,21.336 109.855,22.225 C37.1@101.981,22.225 ; C38.1@94.742,22.352 C38.1@94.869,22.225 C37.1@101.981,22.225
VCC_AD: C25.2 C27.2 D6.2 P25.2 R14.2 U8.7 U17.13 | length 122.2
  Top Layer w0.254: 19.812,52.451 20.529,53.168 U17.13@21.994,53.168
  Top Layer w0.508: C27.2@18.542,24.892 U8.7@18.542,28.752
  Top Layer w0.762: R14.2@9.398,43.942 13.526,39.814 D6.2@28.003,39.814 ; C27.2@18.542,24.892 20.193,24.892 24.892,29.591 24.892,36.703 D6.2@28.003,39.814 ; 19.812,52.451 19.812,50.038 20.32,49.53 C25.2@20.32,48.387 20.32,39.814 ; P25.2@87.63,32.004 63.119,32.004 55.372,39.751 28.384,39.751 D6.2@28.321,39.814 D6.2@28.003,39.814
VCC_DUT_IO: J2.11 S10.2 | length 5.1
  Top Layer w0.762: J2.11@8.382,86.36 8.509,86.487 S10.2@13.462,86.487
VCC_DUT_IO_375: J1.7 S1.1 S11.2 | length 15.1
  Top Layer w0.762: S11.2@157.48,25.273 S1.1@163.068,25.273 168.783,30.988 J1.7@170.18,30.988
VDD5V: C35.1 C36.1 J11.5 J11.6 P24.1 P24.3 P24.5 P24.7 R35.1 S5.1 T6.1 | length 63.3
  Top Layer w0.762: J11.5@107.188,31.496 J11.6@109.728,31.496 121.031,31.496 T6.1@121.539,32.004 P24.1@129.159,32.004
  Top Layer w1.524: R35.1@126.365,22.479 C36.1@133.096,22.479 ; P24.1@129.159,32.004 P24.3@131.699,32.004 P24.3@131.953,32.004 ; P24.7@136.779,32.004 P24.5@134.239,32.004 P24.3@131.953,32.004 ; S5.1@149.352,21.336 148.717,21.971 C35.1@141.224,21.971 140.716,22.479 C36.1@133.096,22.479 ; P24.3@131.953,32.004 133.096,30.861 C36.1@133.096,22.479
VDD15: P4.13 U1.90 | length 16.3
  Bottom Layer w0.508: P4.13@90.932,49.784 90.932,51.181 98.298,58.547 98.298,61.214 U1.90@97.028,62.484
VDD15_318: C21.2 U7.67 | length 5.9
  Top Layer w0.254: v2(30.099,75.311) 31.242,75.311 32.372,76.441 U7.67@32.372,78.319
  Bottom Layer w0.254: C21.2@30.099,74.041 v2(30.099,75.311)
VDD50: P4.16 P24.6 S11.1 U1.86 Z1.1 | length 106.9
  Top Layer w0.762: P4.16@83.312,49.784 83.312,47.498 Z1.1@82.804,46.99 82.804,46.863 88.9,40.767 128.016,40.767 P24.6@134.239,34.544 137.16,37.465 146.939,37.465 S11.1@157.48,26.924
  Bottom Layer w0.508: P4.16@83.312,49.784 83.312,50.927 86.995,54.61 88.773,54.61 93.218,59.055 93.218,61.214 U1.86@91.948,62.484
VDDP: P4.17 P24.4 U1.85 Z1.2 | length 75.8
  Top Layer w0.762: P4.17@80.772,49.784 80.772,47.244 Z1.2@81.026,46.99 81.026,45.847 87.757,39.116 127.127,39.116 P24.4@131.699,34.544
  Bottom Layer w0.762: P4.17@80.772,49.784 80.772,51.562 85.471,56.261 88.265,56.261 U1.85@91.948,59.944
VDDP_318: C20.2 U7.66 | length 4.4
  Top Layer w0.254: v2(32.639,75.311) 32.872,75.544 U7.66@32.872,78.319
  Bottom Layer w0.254: C20.2@32.639,74.041 v2(32.639,75.311)
VPP: P2.4 U1.33 | length 17
  Bottom Layer w0.254: U1.33@109.728,108.204 109.728,111.379 116.332,117.983 P2.4@116.332,122.428
VSS: P4.14 U1.88 Z2.1 | length 19.1
  Top Layer w0.762: Z2.1@88.392,46.99 P4.14@88.392,49.784
  Bottom Layer w0.381: P4.14@88.392,49.784 88.392,50.673 95.758,58.039 95.758,61.214 U1.88@94.488,62.484
XTALIN_1: FDET.2 P3.2 U1.82 | length 33.6
  Top Layer w0.254: P3.2@60.452,65.024 61.722,65.024 FDET.2@71.628,55.118 75.565,59.055 79.999,59.055 82.158,61.214 85.598,61.214 U1.82@86.868,62.484
XTALIN_318: U7.60 XTAL1.1 | length 3.9
  Top Layer w0.254: U7.60@37.622,75.819 39.751,77.948 XTAL1.1@39.751,78.867
XTALOUT_1: P3.1 U1.84 | length 38.2
  Top Layer w0.254: P3.1@60.452,62.484 69.469,53.467 72.136,53.467 73.787,55.118 73.787,55.88 75.946,58.039 87.249,58.039 88.138,58.928 88.138,61.214 U1.84@89.408,62.484
XTALOUT_318: U7.61 XTAL1.2 | length 4
  Top Layer w0.254: U7.61@35.372,78.319 37.048,78.319 XTAL1.2@38.673,79.945
pads on no net: 318UART0.1 318UART0.4 318UART0.6 318UART0.7 318UART0.8 318UART0.9 318UART0.BO1 318UART0.BO2 318UART1.1 318UART1.6 318UART1.7 318UART1.8 318UART1.9 318UART1.BO1 318UART1.BO2 375UART0.1 375UART0.4 375UART0.6 375UART0.7 375UART0.8 375UART0.9 375UART0.BO1 375UART0.BO2 375UART1.1 375UART1.4 375UART1.6 375UART1.7 375UART1.8 375UART1.9 375UART1.BO1 375UART1.BO2 375UART2.1 375UART2.6 375UART2.7 375UART2.8 375UART2.9 375UART2.BO1 375UART2.BO2 375UART3.1 375UART3.4 375UART3.6 375UART3.7 375UART3.8 375UART3.9 375UART3.BO1 375UART3.BO2 FDET.3 FDET.4 J1.1 J1.2 J1.14 J2.8 J2.9 J2.12 J2.13 J2.14 K1.3 K1.4 K2.3 K2.4 K3.3 K3.4 K4.3 K4.4 K5.3 K5.4 K6.3 K6.4 K7.3 K7.4 K8.3 K8.4 NEG.3 NEG.4 P30.3 P30.4 P30.5 P30.7 P30.9 P30.11 P30.13 P30.14 P30.15 P30.16 P30.17 P30.18 RESET.3 RESET.4 S5.3 S6.3 S7.3 U1.0 U1.1 U1.2 U1.19 U1.20 U1.21 U1.22 U1.23 U1.24 U1.25 U1.26 U1.27 U1.28 U1.29 U1.34 U1.49 U1.50 U1.51 U1.52 U1.53 U1.54 U1.55 U1.56 U1.57 U1.58 U1.74 U1.75 U1.76 U1.77 U1.78 U1.79 U1.80 U1.81 U1.83 U1.89 U1.91 U1.104 U1.105 U1.106 U1.107 U1.108 U7.3 U7.4 U7.5 U7.6 U7.7 U7.8 U7.11 U7.12 U7.13 U7.14 U7.15 U7.16 U7.33 U7.36 U7.37 U7.44 U7.45 U7.46 U7.47 U7.49 U7.50 U7.51 U7.52 U7.57 U7.58 U7.59 U7.62 U7.65 U7.69 U7.70 U7.71 U7.72 U7.79 U8.1 U8.5 U8.8 U17.6 U17.7 U17.8 U17.9 U17.10 U17.11 U17.12

## Silkscreen, mask and mechanical layers (free items; w line width, h text height)
Top Overlay:
  lines w0.254: 0.254,174.752 0.254,175.26 ; 1.778,174.498 0.254,175.006 ; 1.778,175.514 0.254,175.006 ; 91.608,175.006 0.254,175.006 ; 108.671,175.006 200.025,175.006 ; 198.501,174.498 200.025,175.006 ; 198.501,175.514 200.025,175.006 ; 200.025,174.752 200.025,175.26 ; 219.839,1.398 220.345,-0.127 ; 220.089,159.259 220.599,160.782 ; 220.091,-0.127 220.599,-0.127 ; 220.345,160.782 220.853,160.782 ; 220.457,70.907 220.345,-0.127 ; 220.487,89.748 220.599,160.782 ; 220.855,1.396 220.345,-0.127 ; 221.105,159.257 220.599,160.782
  text "199.771 (mm)" at 91.862,174.092 h1.52
  text "PF3/RXD0" at 74.93,145.034 h1.02 r270
  text "PF4/TXD0" at 77.597,145.034 h1.02 r270
  text "PD2/RXD2" at 80.137,145.034 h1.02 r270
  text "PD3/TXD2" at 82.55,145.034 h1.02 r270
  text "C2~C11(105)" at 114.808,139.065 h1.52
  text "(1M)" at 64.643,136.779 h1.02
  text "PA0(RXD1)" at 134.112,131.191 h1.02 r270
  text "PA1(TXD1)" at 136.652,131.191 h1.02 r270
  text "PG5(RXD3)" at 139.192,131.191 h1.02 r270
  text "PG6(TXD3)" at 141.732,131.191 h1.02 r270
  text "porst_b(PD7)" at 51.435,128.397 h1.02 r270
  text "podrst_b(PD6)" at 54.102,128.397 h1.02 r270
  text "pdrst_b(PD5)" at 56.515,128.397 h1.02 r270
  text "pdr_n(PD4)" at 59.182,128.397 h1.02 r270
  text "bor_n(PD3)" at 61.468,128.397 h1.02 r270
  text "C42~C46(105)" at 23.495,125.349 h1.52 r90
  text "SCAN_MODE" at 124.587,124.079 h1.02 r90
  text "C0" at 160.274,123.952 h1.02
  text "C3" at 167.894,123.952 h1.02
  text "S1" at 170.561,123.952 h1.02
  text "S5" at 180.594,123.952 h1.02
  text "S9" at 190.754,123.952 h1.02
  text "PC3" at 109.982,119.888 h1.02
  text "PD7" at 81.28,117.856 h1.02 r90
  text "PD6" at 83.82,117.856 h1.02 r90
  text "PD5" at 86.36,117.856 h1.02 r90
  text "PD4" at 88.9,117.856 h1.02 r90
  text "PD1" at 96.647,117.856 h1.02 r90
  text "PC1" at 119.38,117.856 h1.02 r90
  text "PD3" at 91.44,117.729 h1.02 r90
  text "PC0" at 121.793,117.729 h1.02 r90
  text "PD2" at 93.853,117.602 h1.02 r90
  text "PD0" at 99.06,117.602 h1.02 r90
  text "PC7" at 101.727,117.602 h1.02 r90
  text "PC6" at 104.14,117.602 h1.02 r90
  text "PC5" at 106.68,117.602 h1.02 r90
  text "PC2" at 114.3,117.602 h1.02 r90
  text "VPP" at 116.967,117.602 h1.02 r90
  text "PC4" at 109.347,117.475 h1.02 r90
  text "GND" at 62.103,117.094 h1.02
  text "PE2(7816IO1)" at 6.858,116.84 h1.02
  text "SSN(PD7)" at 62.23,114.554 h1.02
  text "PE0(7816CLK)" at 6.858,114.173 h1.02
  text "PE5(SCL)" at 50.546,112.649 h1.02
  text "PE3(7816RST)" at 6.858,112.522 h1.02
  text "VCC" at 62.357,111.887 h1.02
  text "PE6(SDA)" at 50.546,110.236 h1.02
  text "PE1(7816IO0)" at 6.985,109.22 h1.02
  text "PE0" at 62.484,102.489 h1.02
  text "VDISP1" at 50.419,101.981 h1.02
  text "VCC" at 16.764,101.727 h1.02
  text "PE1" at 62.611,100.076 h1.02
  text "VDISP2" at 50.419,99.441 h1.02
  text "PB7" at 136.779,99.06 h1.02
  text "PE2" at 62.611,97.536 h1.02
  text "VDISP3" at 50.419,96.901 h1.02
  text "PB6" at 136.779,96.52 h1.02
  text "PH0_VESAM" at 14.732,95.885 h1.02
  text "PE3" at 62.611,94.996 h1.02
  text "PF4/VCIN1" at 50.292,94.361 h1.02
  text "PB5" at 136.779,93.98 h1.02
  text "PE4" at 62.611,92.456 h1.02
  text "PB4" at 136.779,91.44 h1.02
  text "S15" at 168.783,91.44 h1.02
  text "S10" at 155.829,91.313 h1.02
  text "S20" at 181.229,91.313 h1.02
  text "S25" at 194.437,91.186 h1.02
  text "PE5" at 62.611,89.916 h1.02
  text "PB3" at 136.398,88.9 h1.02
  text "POSEDGE" at 176.53,88.392 h1.02
  text "PE6" at 62.484,87.376 h1.02
  text "IO53" at 44.831,86.487 h1.02
  text "PB2" at 136.525,86.487 h1.02
  text "PB7(K8)" at 148.224,86.091 h1.02
  text "PE7" at 62.611,84.836 h1.02
  text "PB1" at 136.779,83.693 h1.02
  text "PB6(K7)" at 148.336,83.566 h1.02
  text "PF0" at 62.103,82.169 h1.02
  text "IO52" at 44.831,81.788 h1.02
  text "PB0" at 136.525,81.28 h1.02
  text "PB5(K6)" at 148.336,81.026 h1.02
  text "PF1" at 62.103,79.756 h1.02
  text "PA7" at 136.525,78.613 h1.02
  text "PB4(K5)" at 148.209,78.486 h1.02
  text "IO51" at 44.807,77.319 h1.02
  text "PF2" at 62.103,77.089 h1.02
  text "PA6" at 136.525,76.2 h1.02
  text "PB3(K4)" at 148.209,75.946 h1.02
  text "PF3" at 62.103,74.549 h1.02
  text "PF4" at 62.23,74.295 h1.02 r270
  text "PA5" at 136.525,73.66 h1.02
  text "PB2(K3)" at 148.336,73.406 h1.02
  text "IO50" at 44.831,72.898 h1.02
  text "160.9092 (mm)" at 221.372,71.16 h1.52 r89.91
  text "PF5" at 62.357,71.12 h1.02 r270
  text "IO43" at 50.165,70.993 h1.02
  text "PA4" at 136.398,70.993 h1.02
  text "PB1(K2)" at 148.463,70.866 h1.02
  text "IO42(7816IO1)" at 41.91,68.58 h1.02
  text "PA3" at 136.462,68.516 h1.02
  text "PB0(K1)" at 148.463,68.326 h1.02
  text "PF6" at 62.23,68.199 h1.02 r270
  text "IO70(RAP0)" at 4.953,66.294 h1.02
  text "PA2" at 136.525,66.04 h1.02
  text "IO41(7816IO0)" at 41.91,65.913 h1.02
  text "IO71(FOUT)" at 10.16,64.262 h1.02
  text "XIN" at 62.23,64.008 h1.02
  text "PA1" at 136.779,63.373 h1.02
  text "GND" at 148.971,63.373 h1.02 r90
  text "VCC" at 154.305,63.246 h1.02 r90
  text "C_IO16" at 15.24,62.992 h1.02 r270
  text "D_IO17" at 21.971,62.865 h1.02 r270
  text "NEGEDGE" at 175.641,62.865 h1.02
  text "IO40(7816CLK)" at 41.656,62.611 h1.02
  text "XOUT" at 62.103,61.849 h1.02
  text "PA0" at 136.652,60.96 h1.02
  text "SSN(PA3)" at 148.082,58.674 h1.02
  text "318TXD2_IO37" at 35.179,58.42 h1.02
  text "375RXD1_PF1" at 52.451,58.42 h1.02
  text "V4(PA7)" at 164.465,57.531 h1.02
  text "(2M)" at 8.636,57.277 h1.02
  text "PA4(CS)" at 142.24,56.007 h1.02
  text "318RXD2_IO36" at 35.052,55.88 h1.02
  text "375TXD1_PF2" at 52.451,55.753 h1.02
  text "V3(PA6)" at 164.465,54.991 h1.02
  text "PA1(MISO)" at 140.589,53.467 h1.02
  text "(2M)" at 26.416,52.07 h1.02
  text "VDDP" at 81.28,51.562 h1.02 r90
  text "VDD50" at 83.957,51.572 h1.02 r90
  text "CPLL" at 94.107,51.562 h1.02 r90
  text "PH0" at 96.52,51.562 h1.02 r90
  text "PG0" at 101.6,51.562 h1.02 r90
  text "PG1" at 104.14,51.562 h1.02 r90
  text "PF7" at 121.92,51.562 h1.02 r90
  text "GND" at 86.36,51.435 h1.02 r90
  text "VSS" at 89.027,51.435 h1.02 r90
  text "VDD15" at 91.567,51.435 h1.02 r90
  text "PG2" at 106.68,51.435 h1.02 r90
  text "PG3" at 109.22,51.435 h1.02 r90
  text "PG4" at 110.109,51.435 h1.02
  text "PG5" at 114.427,51.435 h1.02 r90
  text "PG6" at 116.84,51.435 h1.02 r90
  text "PG7" at 119.38,51.435 h1.02 r90
  text "TEST_N" at 99.06,51.308 h1.02 r90
  text "PA0(MOSI)" at 140.462,50.927 h1.02
  text "IO74" at 45.72,49.022 h1.02 r90
  text "IO75" at 48.26,49.022 h1.02 r90
  text "IO76" at 50.8,49.022 h1.02 r90
  text "IO77" at 53.34,48.895 h1.02 r90
  text "IO31" at 55.753,48.895 h1.02 r90
  text "IO32" at 58.42,48.895 h1.02 r90
  text "V2(PA5)" at 166.497,48.26 h1.02 r60
  text "PA2(CLK)" at 141.224,48.133 h1.02
  text "TDI/STROBE" at 100.711,48.006 h0.76 r270
  text "TCK" at 105.791,48.006 h0.76 r270
  text "TDO/TDIO" at 108.204,48.006 h0.76 r270
  text "TMS" at 103.251,47.752 h0.76 r270
  text "V1(PA4)" at 167.767,46.355 h1.02 r60
  text "IO35" at 61.595,46.101 h1.02 r90
  text "IO20" at 35.179,43.688 h1.02
  text "IO27" at 52.959,43.434 h1.02
  text "5V" at 10.922,43.18 h1.02
  text "-5V" at 17.907,43.053 h1.02
  text "~~~" at 44.323,42.926 h1.02
  text "PC3(FOUT1)" at 149.987,40.005 h1.02
  text "VBAT" at 129.667,36.195 h1.02 r90
  text "VDDP" at 132.207,36.195 h1.02 r90
  text "VDD50" at 134.747,36.195 h1.02 r90
  text "VCC" at 137.414,36.195 h1.02 r90
  text "PF5(FOUT0)" at 149.86,34.925 h1.02
  text "(PF5)" at 56.769,34.798 h1.02
  text "-5V" at 96.52,33.147 h1.02
  text "VCC5V" at 100.965,33.147 h1.02
  text "VIN5V" at 106.807,33.147 h1.02
  text "(PC1)" at 56.769,32.258 h1.02
  text "+5V" at 83.312,30.226 h1.02
  text "short when use proger" at 138.684,29.845 h1.02
  text "(PF7)" at 56.896,29.337 h1.02
  text "-5V" at 44.831,26.035 h1.02
  text "Proger to DUT" at 146.558,25.654 h0.76
  text "DUT to emulater" at 165.227,20.828 h0.76 r90
  text "VCC" at 158.496,17.78 h1.02
  text "PF7" at 164.719,15.367 h1.02
  text "GND" at 158.623,12.827 h1.02
  text "20160720" at 33.401,5.588 h1.52
  text "FM375V01 TEST BOARD BY XDY" at 15.367,2.794 h1.52
Bottom Overlay:
  text ".Legend" at 114.53,87.098 h0.76
  text "VBAT" at 35.814,76.454 h1.02 r90
  text "VDD15" at 30.734,76.2 h1.02 r90
  text "VDDP" at 33.147,76.2 h1.02 r90
Mechanical 1:
  lines w0.254: 0.635,157.713 cw(c3.45,157.713) 3.45,160.528 ; 0.635,157.734 0.635,3.491 ccw(c3.618,3.491) 3.618,0.508 197.371,0.508 ccw(c197.371,3.543) 200.406,3.543 200.406,9.017 ; 3.429,160.528 197.612,160.528 ; 197.619,160.528 cw(c197.619,157.741) 200.406,157.741 200.406,8.89
Drill Drawing:
  text ".Legend" at 209.804,0.635 h0.76

## Text inside footprints (layer, text, board x,y; h text height)
318UART0: Top Overlay "1" at 26.179,146.101 h0.71; Top Overlay "6" at 25.163,148.641 h0.71; Top Overlay "5" at 10.939,146.101 h0.71; Top Overlay "9" at 11.955,148.641 h0.71
318UART1: Top Overlay "1" at 58.513,146.101 h0.71; Top Overlay "6" at 57.497,148.641 h0.71; Top Overlay "5" at 43.273,146.101 h0.71; Top Overlay "9" at 44.289,148.641 h0.71
375UART0: Top Overlay "1" at 91.736,146.304 h0.71; Top Overlay "6" at 90.72,148.844 h0.71; Top Overlay "5" at 76.496,146.304 h0.71; Top Overlay "9" at 77.512,148.844 h0.71
375UART1: Top Overlay "1" at 157.395,146.304 h0.71; Top Overlay "6" at 156.379,148.844 h0.71; Top Overlay "5" at 142.155,146.304 h0.71; Top Overlay "9" at 143.171,148.844 h0.71
375UART2: Top Overlay "1" at 124.502,146.304 h0.71; Top Overlay "6" at 123.486,148.844 h0.71; Top Overlay "5" at 109.262,146.304 h0.71; Top Overlay "9" at 110.278,148.844 h0.71
375UART3: Top Overlay "1" at 190.415,146.304 h0.71; Top Overlay "6" at 189.399,148.844 h0.71; Top Overlay "5" at 175.175,146.304 h0.71; Top Overlay "9" at 176.191,148.844 h0.71
P8: Top Overlay "2" at 63.5,129.413 h1.27; Top Overlay "1" at 63.627,132.08 h1.27; Top Overlay "9" at 49.149,131.826 h1.27; Top Overlay "10" at 47.987,129.394 h1.27
P9: Top Overlay "8" at 174.498,48.895 h1.27 r270; Top Overlay "7" at 171.958,48.895 h1.27 r270; Top Overlay "1" at 171.958,60.071 h1.27 r270; Top Overlay "2" at 174.498,60.579 h1.27 r270
P11: Top Overlay "3" at 49.276,114.808 h1.27 r90; Top Overlay "4" at 46.736,114.808 h1.27 r90; Top Overlay "2" at 46.736,108.204 h1.27 r90; Top Overlay "1" at 49.276,108.712 h1.27 r90
P12: Top Overlay "8" at 84.582,135.128 h1.27; Top Overlay "7" at 84.582,132.588 h1.27; Top Overlay "1" at 73.406,132.588 h1.27; Top Overlay "2" at 72.898,135.128 h1.27
P15: Top Overlay "8" at 143.764,135.128 h1.27; Top Overlay "7" at 143.764,132.588 h1.27; Top Overlay "1" at 132.588,132.588 h1.27; Top Overlay "2" at 132.08,135.128 h1.27
P17: Top Overlay "1" at 161.036,125.476 h1.02; Top Overlay "29" at 194.945,89.662 h1.02; Top Overlay "13" at 190.754,125.73 h1.02; Top Overlay "14" at 156.337,89.916 h1.02
P18: Top Overlay "8" at 46.736,104.14 h1.27 r90; Top Overlay "7" at 49.276,104.14 h1.27 r90; Top Overlay "1" at 49.276,92.964 h1.27 r90; Top Overlay "2" at 46.736,92.456 h1.27 r90
P19: Top Overlay "16" at 153.924,88.392 h1.27; Top Overlay "15" at 158.369,88.392 h1.27; Top Overlay "1" at 159.258,66.294 h1.27 r90; Top Overlay "2" at 156.718,66.294 h1.27 r90
P20: Top Overlay "8" at 153.543,45.974 h1.27 r90; Top Overlay "7" at 151.003,46.101 h1.27 r90; Top Overlay "1" at 148.844,57.912 h1.27 r90; Top Overlay "2" at 155.575,57.404 h1.27 r90
P24: Top Overlay "8" at 138.303,34.036 h1.27; Top Overlay "7" at 138.303,31.496 h1.27; Top Overlay "1" at 127.127,31.496 h1.27; Top Overlay "2" at 126.619,34.036 h1.27
P28: Top Overlay "3" at 46.863,53.467 h1.27; Top Overlay "4" at 51.689,53.721 h1.27; Top Overlay "2" at 50.292,61.468 h1.27 r270; Top Overlay "1" at 47.752,60.96 h1.27 r270
P29: Top Overlay "3" at 12.065,98.044 h1.27 r270; Top Overlay "4" at 14.605,98.044 h1.27 r270; Top Overlay "2" at 14.605,104.648 h1.27 r270; Top Overlay "1" at 12.065,104.14 h1.27 r270
P30: Top Overlay "20" at 5.08,98.044 h1.27 r270; Top Overlay "19" at 2.54,98.044 h1.27 r270; Top Overlay "2" at 5.08,124.46 h1.27 r270; Top Overlay "1" at 2.54,124.46 h1.27 r270
U1: Top Overlay "108" at 121.539,62.23 h0.71; Top Overlay "107" at 121.793,59.436 h0.71; Top Overlay "80" at 82.048,63.104 h0.71 r180; Top Overlay "79" at 82.048,61.104 h0.71 r180; Top Overlay "78" at 76.073,67.437 h0.71; Top Overlay "77" at 73.406,67.437 h0.71; Top Overlay "56" at 76.2,99.822 h0.71; Top Overlay "55" at 73.533,99.822 h0.71; Top Overlay "54" at 81.407,105.029 h0.71; Top Overlay "53" at 81.407,107.696 h0.71; Top Overlay "25" at 124.968,108.839 h0.71 r180; Top Overlay "26" at 124.968,106.426 h0.71 r180; Top Overlay "24" at 128.143,100.457 h0.71 r90; Top Overlay "23" at 130.81,100.33 h0.71 r90; Top Overlay "2" at 127.127,67.691 h0.71; Top Overlay "1" at 129.921,67.818 h0.71